# EAGLE board MOD-v2-3 (EAGLE 8.3.1)
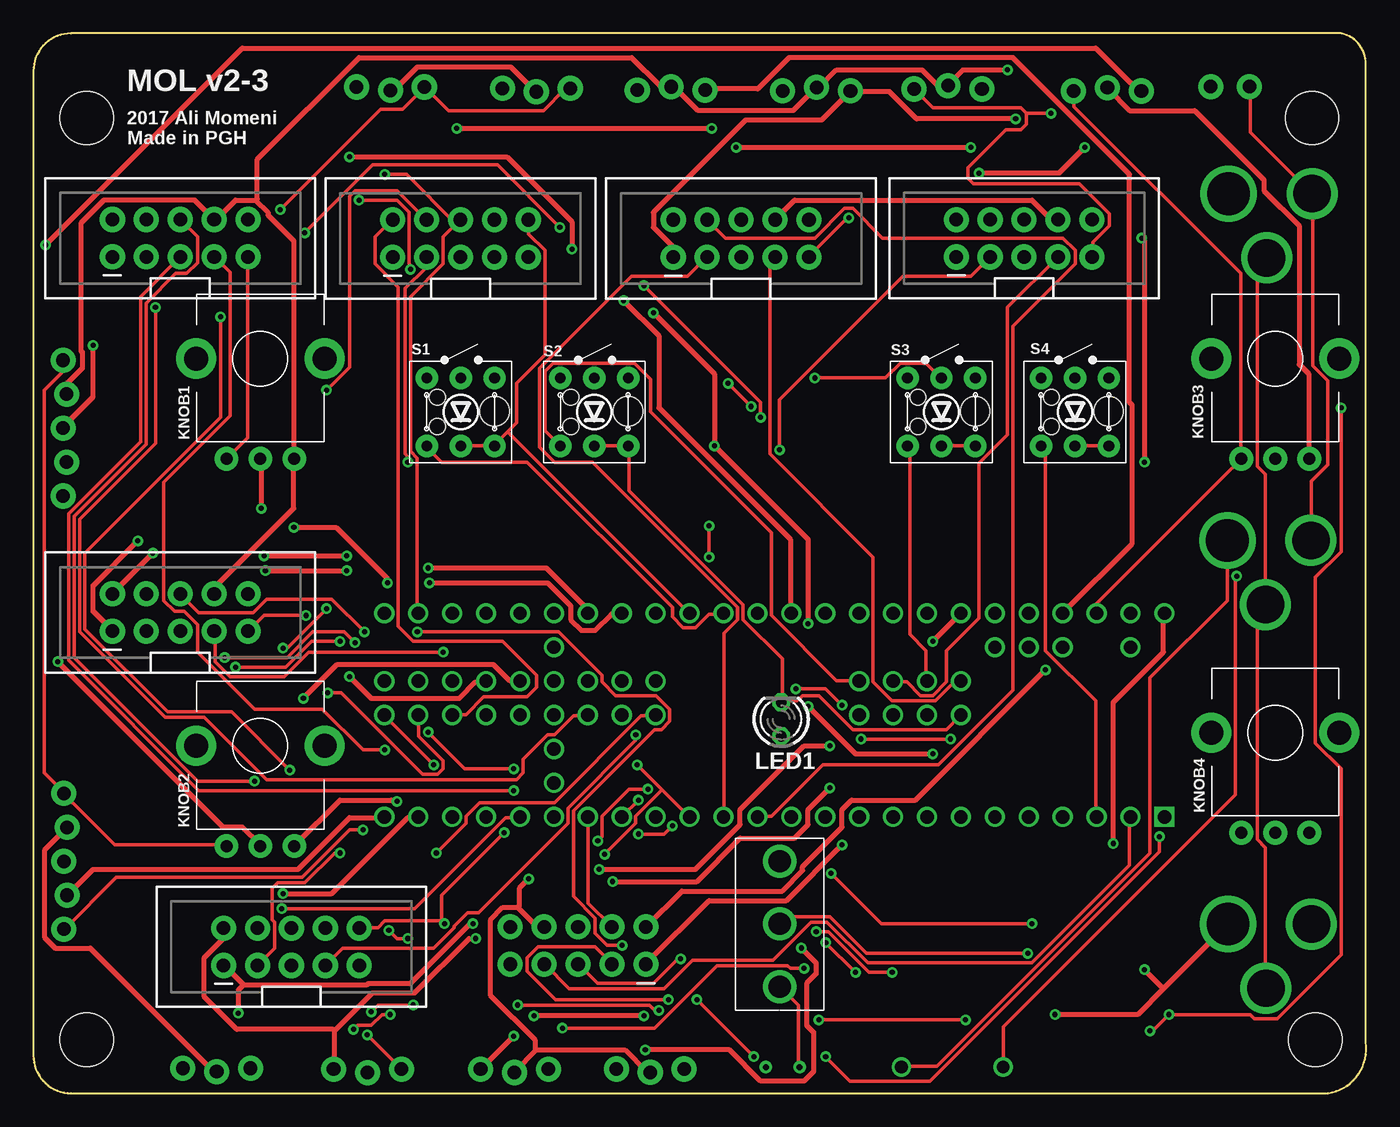
[diagram p0: board, top side]
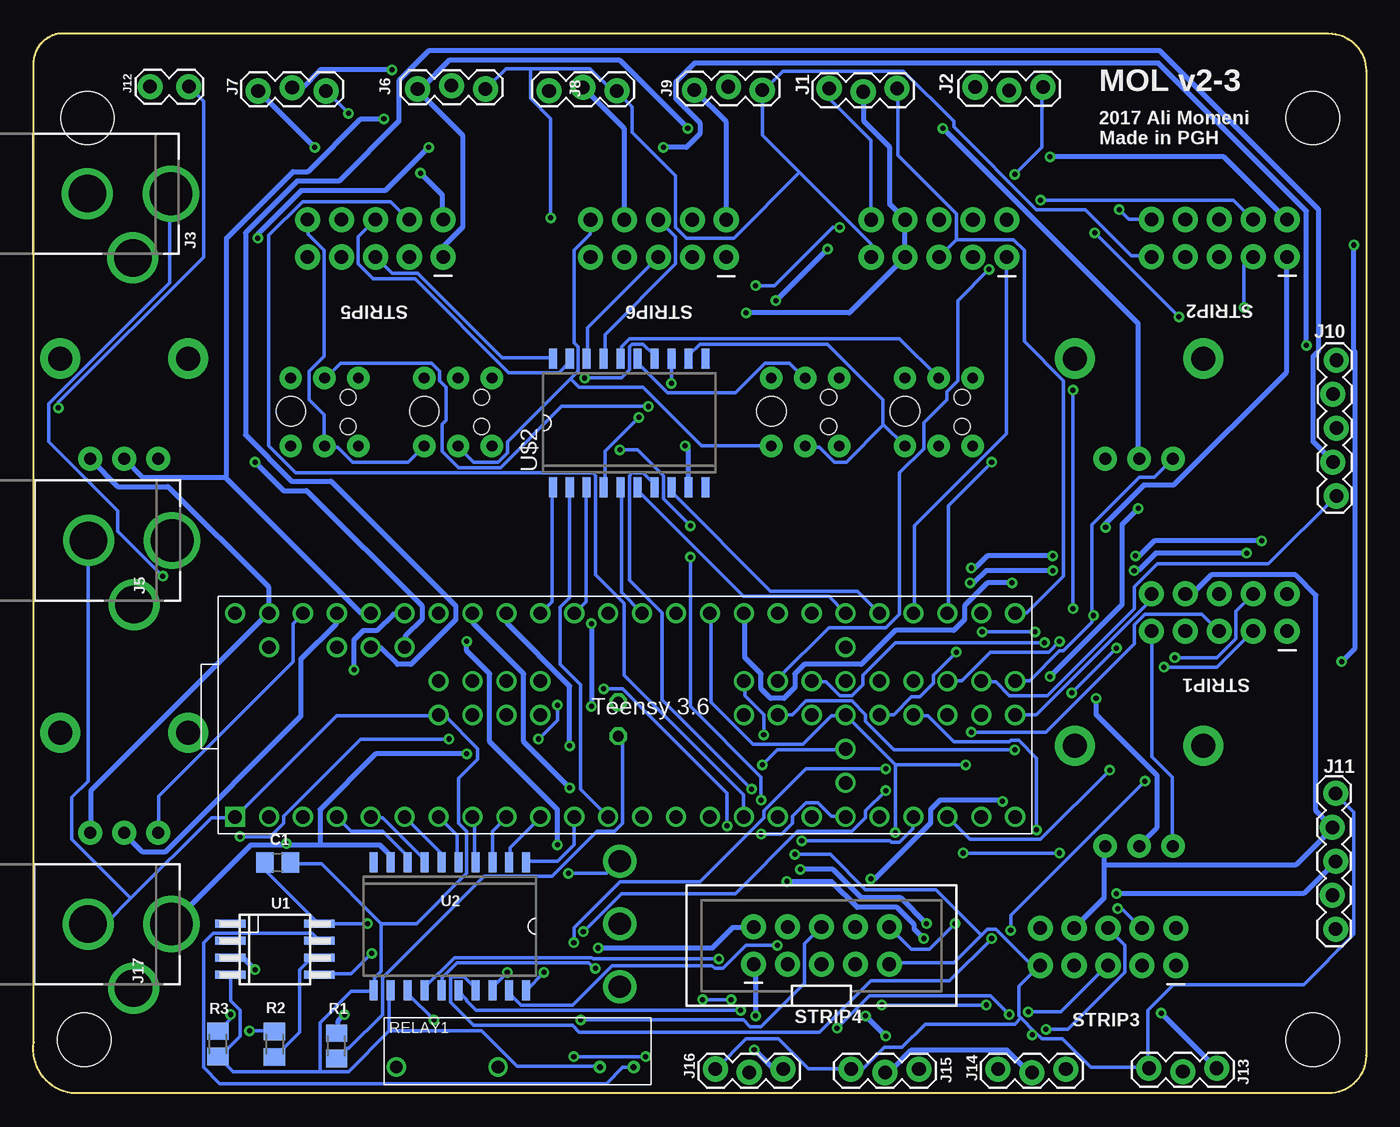
[diagram p1: board, bottom side, seen from below]

Size 99.81 x 79.34 mm. Coordinates in mm from the lower left corner, seen from the top.
Outline: 2.81,79.34 arc90 0,76.53 0,2.81 arc90 2.81,0 96.96,0 arc90 99.77,3.81 99.77,77.26 arc74 97.96,79.34 2.81,79.34
Copper layers (1*16): Top 0.035559375mm / dielectric 1.501140625mm / Bottom 0.035559375mm
Design rules "typical_4pcb *": minimum track width 10mil, minimum drill 15mil, track to track 6mil, track to pad 6mil, pad to pad 6mil, via to via 10mil, smd to smd 6mil, copper to edge 15mil, drill to drill 8mil, minimum pad ring 10mil, minimum via ring 8mil, stop-mask expansion 4mil, vias tented up to drill 0mil, thermal gap 10mil
Net classes: 2 Power: width 0.381 mm, clearance 0.279 mm; 3 Analog Sig: width 0.381 mm, clearance 0.279 mm
Holes 4 mm at 4,73 4,4 96,4 95.75,73

## Footprints (pad centres in the part's own frame; a part is rotated, then mirrored left to right if it is on the bottom)
C0805 = smd 1.3 x 1.5: 1 -0.95,0; 2 0.95,0
1X03_LOCK@1 = drill 1.016 pad 1.88: 1 0,0.127; 2 2.54,-0.127; 3 5.08,0.127
DCJACK_2MM_PTH = drill 2.8: GND 0,7.35; GNDBREAK 4.8,10.75 | drill 3.2: PWR 0,13.6
2X5-SHROUDED_LOCK = drill 1.016 pad 1.88: 1 -1.397,5.08; 2 1.397,5.08; 3 -1.397,2.54; 4 1.397,2.54; 5 -1.397,0; 6 1.397,0; 7 -1.397,-2.54; 8 1.397,-2.54; 9 -1.397,-5.08; 10 1.397,-5.08
1X03_LOCK = drill 1.016 pad 1.88: 1 0,0.127; 2 2.54,-0.127; 3 5.08,0.127
1X05_LOCK = drill 1.016 pad 1.88: 1 0,0.127; 2 2.54,-0.127; 3 5.08,0.127; 4 7.62,-0.127; 5 10.16,0.127
1X02_LOCK = drill 1.016 pad 1.88: 1 -0.178,0; 2 2.718,0
POT_ALPHA_RD901F-40-(L)R1 = drill 0.9 pad 1.778: 1 -2.54,-7.5; 2 0,-7.5; 3 2.54,-7.5 | drill 1.8 pad 3: M1 -4.8,0; M2 4.8,0
LED3MM = drill 0.813 octagon: A -1.27,0; K 1.27,0
M0805 = smd 1.3 x 1.6: 1 -0.95,0; 2 0.95,0
G6DN-1A = drill 0.45: 1 0,0; 2 2.54,0 | drill 0.95: 5 10.16,0; 8 17.78,0
SWITCH_TR2-MOMENTARY-LED = drill 0.8 pad 1.676: 1 2.54,-2.54; 2 2.54,2.54; 3 -2.54,-2.54; 4 -2.54,2.54; A 0,2.54; C 0,-2.54 | hole 2.2: 2.53,0.05 | hole 1.2: -1.76,1.1; -1.76,-1.09
SWITCH_SPDT_500SSP1S2M2QEA = drill 1.65: 1 -4.7,0; 2 0,0; 3 4.7,0
TEENSY3-6_NO-USB-HOST = drill 1: 0 3.81,1.27; 1 6.35,1.27; 2 8.89,1.27; 3 11.43,1.27; 3V3(1) 36.83,1.27; 3V3(2) 46.99,6.35; 3V3(3) 6.35,16.51; 3V3(4) 59.69,11.43; 4 13.97,1.27; 5 16.51,1.27; 6 19.05,1.27; 7 21.59,1.27; 8 24.13,1.27; 9 26.67,1.27; 10 29.21,1.27; 11 31.75,1.27; 12 34.29,1.27; 13 34.29,16.51; 14 31.75,16.51; 15 29.21,16.51; 16 26.67,16.51; 17 24.13,16.51; 18 21.59,16.51; 19 19.05,16.51; 20 16.51,16.51; 21 13.97,16.51; 22 11.43,16.51; 23 8.89,16.51; 24 39.37,1.27; 25 41.91,1.27; 26 44.45,1.27; 27 46.99,1.27; 28 49.53,1.27; 29 52.07,1.27; 30 54.61,1.27; 31 57.15,1.27; 32 59.69,1.27; 33 59.69,16.51; 34 57.15,16.51; 35 54.61,16.51; 36 52.07,16.51; 37 49.53,16.51; 38 46.99,16.51; 39 44.45,16.51; 40 39.37,8.89; 41 41.91,8.89; 42 44.45,8.89; 43 49.53,8.89; 44 52.07,8.89; 45 54.61,8.89; 46 57.15,8.89; 47 57.15,11.43; 48 54.61,11.43; 49 52.07,11.43; 50 49.53,11.43; 51 44.45,11.43; 52 41.91,11.43; 53 39.37,11.43; 54 24.13,11.43; 55 21.59,11.43; 56 19.05,11.43; 57 16.51,11.43; A10 11.43,13.97; A11 13.97,13.97; AGND 3.81,16.51; AREF 8.89,13.97; DAC0 41.91,16.51; DAC1 39.37,16.51; DC 21.59,8.89; DD 24.13,8.89; DE 19.05,8.89; G1 46.99,8.89; G2 36.83,16.51; G3 59.69,8.89; G6 16.51,8.89; P 46.99,11.43; R 46.99,13.97; VBAT 46.99,3.81; VIN 1.27,16.51; VUSB 3.81,13.97 | drill 1 square: G0 1.27,1.27
ATTINY85 = smd 0.6 x 2.286: 1 -1.905,-3.33; 2 -0.635,-3.33; 3 0.635,-3.33; 4 1.905,-3.33; 5 1.905,3.33; 6 0.635,3.33; 7 -0.635,3.33; 8 -1.905,3.33
SOIC20 = smd 0.6 x 1.5: 1 -5.715,-4.8; 2 -4.445,-4.8; 3 -3.175,-4.8; 4 -1.905,-4.8; 5 -0.635,-4.8; 6 0.635,-4.8; 7 1.905,-4.8; 8 3.175,-4.8; 9 4.445,-4.8; 10 5.715,-4.8; 11 5.715,4.8; 12 4.445,4.8; 13 3.175,4.8; 14 1.905,4.8; 15 0.635,4.8; 16 -0.635,4.8; 17 -1.905,4.8; 18 -3.175,4.8; 19 -4.445,4.8; 20 -5.715,4.8

## Placement (x,y rotation side)
C1  10uF  [C0805]  81.51,17.27 0 bottom
J1  SERVO1  [1X03_LOCK@1]  40.21,75.1 0 bottom
J2  SERVO2  [1X03_LOCK@1]  29.28,75.2 0 bottom
J3  TO Pi  [DCJACK_2MM_PTH]  103.11,67.34 270 bottom
J4  ACTUATORS  [2X5-SHROUDED_LOCK]  31.99,63.99 90 top
J5  +5V (Pi)  [DCJACK_2MM_PTH]  103.02,41.38 270 bottom
J6  AN5  [1X03_LOCK]  65.95,75.31 180 bottom
J7  AN6  [1X03_LOCK]  77.89,75.16 180 bottom
J8  AN7  [1X03_LOCK]  56.11,75.17 180 bottom
J9  AN8  [1X03_LOCK]  45.22,75.22 180 bottom
J10  JOY1  [1X05_LOCK]  2.36,54.87 270 bottom
J11  JOY2  [1X05_LOCK]  2.4,22.44 270 bottom
J12  RPi-Shutdown  [1X02_LOCK]  88.35,75.35 180 bottom
J13  AN5  [1X03_LOCK]  16.27,1.75 0 bottom
J14  AN6  [1X03_LOCK]  27.56,1.67 0 bottom
J15  AN7  [1X03_LOCK]  38.57,1.68 0 bottom
J16  AN8  [1X03_LOCK]  48.74,1.69 0 bottom
J17  +5V (Main)  [DCJACK_2MM_PTH]  103.06,12.66 270 bottom
KNOB1  [POT_ALPHA_RD901F-40-(L)R1]  17,55 0 top
KNOB2  [POT_ALPHA_RD901F-40-(L)R1]  17,26 0 top
KNOB3  [POT_ALPHA_RD901F-40-(L)R1]  93,55 0 top
KNOB4  [POT_ALPHA_RD901F-40-(L)R1]  93,27 0 top
LED1  [LED3MM]  56,28 90 top
R1  330  [M0805]  77.1,3.54 270 bottom
R2  2.2K  [M0805]  81.75,3.67 90 bottom
R3  3.3K  [M0805]  85.98,3.69 270 bottom
RELAY1  RELAY-OMRON-G6DN  [G6DN-1A]  54.85,1.96 180 bottom
S1  SW-LEDPTH  [SWITCH_TR2-MOMENTARY-LED]  32,51 0 top
S2  SW-LEDPTH  [SWITCH_TR2-MOMENTARY-LED]  42,51 0 top
S3  SW-LEDPTH  [SWITCH_TR2-MOMENTARY-LED]  68,51 0 top
S4  SW-LEDPTH  [SWITCH_TR2-MOMENTARY-LED]  78,51 0 top
STRIP1  [2X5-SHROUDED_LOCK]  11,35.99 90 top
STRIP2  [2X5-SHROUDED_LOCK]  11,64.01 90 top
STRIP3  [2X5-SHROUDED_LOCK]  19.32,10.96 90 top
STRIP4  [2X5-SHROUDED_LOCK]  40.79,11.05 90 bottom
STRIP5  [2X5-SHROUDED_LOCK]  74.19,64 90 top
STRIP6  [2X5-SHROUDED_LOCK]  53,63.99 90 top
SW2  500SSP1S2M2QEA  [SWITCH_SPDT_500SSP1S2M2QEA]  55.89,12.68 270 top
TEENSY  TEENSY3_6-ALI_NO-USB-HOST  [TEENSY3-6_NO-USB-HOST]  85.97,19.42 0 bottom
U1  ATTINY85  [ATTINY85]  81.71,10.77 270 bottom
U2  A2982  [SOIC20]  68.61,12.5 180 bottom
U$2  A2982  [SOIC20]  55.19,50.18 0 bottom

## Library data of the parts
C1 = resistor
J1 = SparkFun-Connectors; 5V: +5V; GND: GND; SERVO1: SERVO1
J2 = SparkFun-Connectors; 5V: +5V; GND: GND; SERVO2: SERVO_2
J3 J5 J17 = adafruit
J4 STRIP1-STRIP6 = SparkFun-Connectors; PROD_ID: CONN-08671; SF_ID: PRT-08506
J6 = SparkFun-Connectors; AN9: AN9; GND: GND; VCC: VCC
J7 = SparkFun-Connectors; AN10: AN10; GND: GND; VCC: VCC
J8 = SparkFun-Connectors; AN11: AN11; GND: GND; VCC: VCC
J9 = SparkFun-Connectors; AN12: AN12; GND: GND; VCC: VCC
J10 = SparkFun-Connectors; B: B; GND: gnd; H: H; V: V; VCC: vcc
J11 = SparkFun-Connectors; B: B; GND: GND; H: H; V: V; VCC: VCC
J12 = SparkFun-Connectors; GND: GND; SIG: SIG
J13 = SparkFun-Connectors; AN5: AN5; GND: GND; VCC: VCC
J14 = SparkFun-Connectors; AN6: AN6; GND: GND; VCC: VCC
J15 = SparkFun-Connectors; AN7: AN7; GND: GND; VCC: VCC
J16 = SparkFun-Connectors; AN8: AN8; GND: GND; VCC: VCC
KNOB1-KNOB4 RELAY1 S1-S4 TEENSY U2 U$2 = CMU-ArtFab
LED1 = led; GND: -; P: +
R1-R3 = rcl
SW2 = CMU-ArtFab; DIGIKEY: EG5137-ND
U1 = attiny85

## Nets
+3V3: J4.9 J6.1 J7.1 J8.1 J9.1 J10.1 J11.1 J13.1 J14.1 J15.1 J16.1 KNOB1.1 KNOB2.1 KNOB3.1 KNOB4.1 STRIP1.9 STRIP2.9 STRIP3.9 STRIP4.9 STRIP5.9 STRIP6.9 TEENSY.3V3(1) TEENSY.3V3(2) TEENSY.3V3(3) TEENSY.3V3(4)
+5V [Power]: J1.2 J2.2 J4.7 J4.8 J17.PWR R1.1 TEENSY.VIN U1.3 U2.9 U$2.9
+5V-BATTERY: C1.1 SW2.1 U1.8
+5V-BATTERY-PI: J5.PWR RELAY1.5
AGND [Analog Sig]: J6.2 J7.2 J8.2 J9.2 J10.2 J11.2 J13.2 J14.2 J15.2 J16.2 KNOB1.3 KNOB2.3 KNOB3.3 KNOB4.3 STRIP1.8 STRIP2.8 STRIP3.8 STRIP4.8 STRIP5.8 STRIP6.8 TEENSY.AGND
AN1 [Analog Sig]: STRIP1.1 TEENSY.39
AN2 [Analog Sig]: STRIP1.2 TEENSY.DAC0
AN3 [Analog Sig]: STRIP2.1 TEENSY.DAC1
AN4 [Analog Sig]: STRIP2.2 TEENSY.15
AN5 [Analog Sig]: J13.3 STRIP3.1 TEENSY.18
AN6 [Analog Sig]: J14.3 STRIP3.2 TEENSY.19
AN7 [Analog Sig]: J15.3 STRIP4.1 TEENSY.20
AN8 [Analog Sig]: J16.3 STRIP4.2 TEENSY.21
AN9 [Analog Sig]: J6.3 KNOB1.2 STRIP5.1 TEENSY.49
AN10 [Analog Sig]: J7.3 KNOB2.2 STRIP5.2 TEENSY.50
AN11 [Analog Sig]: J8.3 KNOB3.2 STRIP6.1 TEENSY.22
AN12 [Analog Sig]: J9.3 KNOB4.2 STRIP6.2 TEENSY.23
B1: STRIP1.3 TEENSY.48
B2: STRIP1.4 TEENSY.51
B3: STRIP2.3 TEENSY.42
B4: STRIP2.4 TEENSY.52
B5: STRIP3.3 TEENSY.40
B6: STRIP3.4 TEENSY.28
B7: STRIP4.3 TEENSY.27
B8: STRIP4.4 TEENSY.26
B9: STRIP5.3 TEENSY.25
B10: STRIP5.4 TEENSY.24
B11: STRIP6.3 TEENSY.12
B12: STRIP6.4 TEENSY.11
B13: S1.3 TEENSY.13
B14: S2.3 TEENSY.54
B15: S3.3 TEENSY.56
B16: S4.3 TEENSY.1
GND: C1.2 J1.1 J2.1 J3.GND J4.10 J5.GND J12.2 J17.GND LED1.K R3.2 RELAY1.2 S1.1 S1.C S2.1 S2.C S3.1 S3.C S4.1 S4.C STRIP1.10 STRIP2.10 STRIP3.10 STRIP4.10 STRIP5.10 STRIP6.10 SW2.3 TEENSY.G0 TEENSY.G1 TEENSY.G2 TEENSY.G3 TEENSY.G6 U1.4 U2.11 U2.12 U$2.12
GNDBREAK: J3.GNDBREAK J5.GNDBREAK J17.GNDBREAK
JOYB1: J10.5 TEENSY.47
JOYB2: J11.5 TEENSY.44
JOYH1 [Analog Sig]: J10.3 TEENSY.A11
JOYH2 [Analog Sig]: J11.3 TEENSY.31
JOYV1 [Analog Sig]: J10.4 TEENSY.A10
JOYV2 [Analog Sig]: J11.4 TEENSY.32
LED1: STRIP1.7 TEENSY.43
LED2: STRIP2.7 TEENSY.41
LED3: STRIP3.7 TEENSY.53
LED4: STRIP4.7 TEENSY.0
LED5: STRIP5.7 TEENSY.55
LED6: STRIP6.7 TEENSY.57
M_INA: J4.2 TEENSY.45
M_INB: J4.4 TEENSY.46
M_PWMA: J4.1 TEENSY.36
M_PWMB: J4.3 TEENSY.35
N$2: LED1.A R1.2
N$3: SW2.2 U1.5
N$4: RELAY1.1 U1.7
N$5: J12.1 R2.2 R3.1
N$6: J3.PWR RELAY1.8
PI-REST: R2.1 U1.6
PWM1: TEENSY.2 U2.8
PWM2: TEENSY.3 U2.7
PWM3: TEENSY.4 U2.6
PWM4: TEENSY.5 U2.5
PWM5: TEENSY.6 U2.4
PWM6: TEENSY.7 U2.3
PWM7: TEENSY.8 U2.2
PWM8: TEENSY.9 U2.1
PWM9: TEENSY.37 U$2.8
PWM10: TEENSY.29 U$2.7
PWM11: TEENSY.38 U$2.6
PWM12: TEENSY.14 U$2.5
PWM13: TEENSY.30 U$2.4
PWM14: TEENSY.16 U$2.3
PWM15: TEENSY.10 U$2.2
PWM16: TEENSY.17 U$2.1
PWM_1: STRIP1.5 U2.20
PWM_2: STRIP1.6 U2.19
PWM_3: STRIP2.5 U2.18
PWM_4: STRIP2.6 U2.17
PWM_5: STRIP3.5 U2.16
PWM_6: STRIP3.6 U2.15
PWM_7: STRIP4.5 U2.14
PWM_8: STRIP4.6 U2.13
PWM_9: STRIP5.5 U$2.20
PWM_10: STRIP5.6 U$2.19
PWM_11: STRIP6.5 U$2.18
PWM_12: STRIP6.6 U$2.17
PWM_13: S1.A U$2.16
PWM_14: S2.A U$2.15
PWM_15: S3.A U$2.14
PWM_16: S4.A U$2.13
S1: J1.3 J4.5 TEENSY.33
S2: J2.3 J4.6 TEENSY.34

## Tracks (layer width: path | path; a pad name or v marks a point on that pad's centre or on a via)
+3V3  (via drill 0.38)
  Top 0.254: 47.09,22.71 49.07,20.73 TEENSY.3V3(1) | 47.09,22.71 v45.21,24.59 | v24.99,4.37 27.53,1.83 J14.1 | 47.09,22.71 45.11,20.73 45.11,20.22 v42.77,17.88 | STRIP2.9 16.05,62.59 16.05,49.07 14.53,47.55 KNOB1.1 | KNOB2.1 14.43,18.59 6.1,18.59 2.34,22.35 J11.1 2.23,22.55 0.81,23.98 0.81,52.63 2.13,53.95 2.13,54.86 J10.1 | v20.42,35.76 17.27,35.76 16.15,34.65 STRIP1.9 | TEENSY.3V3(3) 79.65,35.97 79.65,36.68 90.42,47.45 KNOB3.1 90.42,47.55 90.42,61.37 77.93,73.86 77.93,74.98 J7.1 | v61.06,65.53 60.96,65.53 58.12,62.69 STRIP6.9 | 74.37,73.36 74.37,72.54 73.97,72.14 72.85,72.14 70,69.29 70,68.48 70.41,68.07 78.33,68.07 80.57,65.84 80.57,64.92 79.35,63.7 79.35,62.69 STRIP5.9 | 74.37,73.36 73.97,73.76 67.36,73.76 66.04,75.08 J6.1 | 74.37,73.36 v76.2,73.36
  Bottom 0.254: v45.21,24.59 44.09,25.7 39.01,25.7 TEENSY.3V3(2) | J16.1 48.67,1.83 46.43,4.06 43.99,4.06 41.76,1.83 38.61,1.83 J15.1 38.51,1.83 37.69,1.83 36.07,3.45 34.75,3.45 33.02,5.18 26.31,5.18 25.86,5.64 | 25.86,5.64 26.01,5.79 26.01,8.03 24.49,9.55 STRIP3.9 24.79,9.35 27.74,12.29 28.35,12.29 28.8,11.84 | 25.86,5.64 24.79,4.57 | 24.79,4.57 24.28,4.06 22.76,4.06 20.62,1.93 16.36,1.93 J13.1 16.36,2.03 16.36,6.2 14.43,8.13 4.67,8.13 0.91,11.89 0.91,21.03 2.23,22.35 J11.1 | 24.79,4.57 v24.99,4.37 | 28.8,11.84 30.89,9.75 35.66,9.75 STRIP4.9 | v42.77,17.88 40.13,17.88 37.49,15.24 32.21,15.24 28.8,11.84 | 20.52,35.76 20.52,42.57 16.97,46.13 15.85,46.13 14.53,47.45 KNOB1.1 | 20.52,35.76 20.52,35.26 22.66,33.12 22.96,33.12 25.2,30.89 26.21,30.89 TEENSY.3V3(4) | STRIP1.9 16.05,34.54 16.05,25.2 14.53,23.67 14.53,18.59 KNOB2.1 | v20.42,35.76 20.52,35.76 | KNOB4.1 90.42,19.51 90.42,22.25 80.37,32.31 80.37,35.15 79.65,35.87 TEENSY.3V3(3) | 42.42,68.94 45.21,71.73 J9.1 45.11,75.08 43.69,76.5 34.65,76.5 30.89,72.75 30.89,72.34 24.69,66.14 21.03,66.14 17.58,62.69 16.15,62.69 STRIP2.9 | 42.42,68.94 37.08,63.6 37.08,62.69 J4.9 | 62.59,76.71 64.41,76.71 65.94,75.18 J6.1 | 62.59,76.71 58.12,76.71 56.49,75.08 56.19,75.08 J8.1 56.08,74.98 54.97,73.86 54.97,71.93 51.71,68.68 51.71,64.82 50.9,64.01 47.35,64.01 42.42,68.94 | v61.06,65.53 61.06,72.95 62.59,74.47 62.59,76.71 | v76.2,73.36 77.83,74.98 J7.1
+5V  (via drill 0.38)
  Top 0.381: v76.5,5.89 82.7,5.89 84.63,7.82 | 84.63,7.82 89.41,12.6 J17.PWR | 84.63,7.82 v83.21,9.25 | v80.87,18.69 80.87,29.26 84.63,33.02 84.63,35.87 TEENSY.VIN | v46.43,58.42 51,53.85 v51,48.46 58.01,41.45 v58.01,35.15 | J2.2 26.82,75.08 27.03,75.08 28.75,76.81 35.76,76.81 37.59,74.98 J1.2 | v67.36,25.4 61.57,25.4 v58.01,28.96
  Bottom 0.381: 80.87,18.59 83.52,18.59 89.41,12.7 J17.PWR | 80.87,18.59 78.33,18.59 | 78.33,18.59 73.86,18.59 73.15,17.88 73.15,17.37 U2.9 | v76.5,5.89 77.01,5.38 77.01,4.57 R1.1 | v83.21,9.25 84.02,10.06 85.04,10.06 U1.3 | v80.87,18.69 80.87,18.59 | v51,48.46 50.8,48.26 50.8,45.41 U$2.9 | v46.43,58.42 38.71,58.42 34.54,62.59 J4.7 34.54,62.79 34.54,65.33 J4.8 34.65,65.53 35.66,66.55 35.66,70.81 37.59,72.75 37.59,74.88 J1.2 | 78.33,18.59 78.33,21.23 74.17,25.4 v67.36,25.4 | v58.01,35.15 v58.01,28.96
+5V-BATTERY  (via drill 0.38)
  Top 0.254: v74.78,12.7 63.5,12.7 v59.74,16.46
  Bottom 0.254: C1.1 82.4,17.17 82.4,16.66 78.44,12.7 U1.8 78.33,12.7 v74.78,12.7 | v59.74,16.46 56.9,16.46 55.98,17.37 SW2.1
+5V-BATTERY-PI
  Top 0.254: RELAY1.5 65.02,2.03 67.67,2.03 83.62,17.98 83.62,31.09 89.41,36.88 89.41,41.35 J5.PWR
AGND  (via drill 0.38)
  Top 0.381: STRIP5.8 76.71,65.43 76.2,65.43 74.78,66.85 57,66.85 55.58,65.43 STRIP6.8 | v72.95,76.61 69.6,76.61 68.58,75.59 J6.2 68.48,75.49 67.67,75.49 66.55,76.61 60.15,76.61 58.83,75.29 J8.2 58.62,75.29 56.9,73.56 49.78,73.56 48.06,75.29 47.85,75.29 J9.2 47.65,75.49 46.84,75.49 44.81,77.52 24.38,77.52 16.76,69.9 16.76,66.95 16.66,66.85 | KNOB3.3 95.5,47.55 95.5,53.85 94.79,54.56 94.79,64.92 92.15,67.56 92.15,68.38 86.97,73.56 82.09,73.56 80.47,75.18 J7.2 | STRIP1.8 13.61,37.39 13.61,37.9 19.51,43.79 19.51,47.45 KNOB1.3 19.51,47.65 19.51,63.8 17.58,65.73 17.58,65.94 16.66,66.85 | J10.2 2.54,52.43 2.54,53.14 3.66,54.25 3.66,55.47 3.56,55.58 3.56,65.13 5.28,66.85 12.09,66.85 13.51,65.43 STRIP2.8 13.72,65.43 15.14,66.85 16.66,66.85 | 37.69,3.25 44.3,3.25 45.92,1.63 46.13,1.63 J16.2 | 37.69,3.25 36.07,1.63 J15.2 | 36.27,13.92 37.69,12.5 38.2,12.5 STRIP4.8 | 36.27,13.92 35.15,13.92 34.24,13.01 34.24,7.32 37.59,3.96 37.59,3.35 37.69,3.25 | J13.2 13.72,1.63 13.51,1.63 4.27,10.87 1.63,10.87 0.81,11.68 0.81,18.19 2.44,19.81 J11.2 | v37.08,16.05 36.37,15.34 36.37,14.02 36.27,13.92 | v27.23,21.84 26.92,21.84 26.82,21.95 22.96,21.95 19.61,18.59 KNOB2.3
  Bottom 0.381: KNOB3.3 95.5,47.45 93.47,45.41 89.71,45.41 82.19,37.9 82.19,35.97 TEENSY.AGND 82.3,35.87 95.5,22.66 95.5,19.51 KNOB4.3 | STRIP6.8 55.58,65.43 55.58,72.24 58.62,75.29 J8.2 | v72.95,76.61 78.33,76.61 79.65,75.29 80.37,75.29 J7.2 | J14.2 25.09,1.63 25.3,1.63 26.92,3.25 34.04,3.25 35.66,1.63 35.97,1.63 J15.2 | 19.61,17.07 19.61,14.63 21.84,12.39 STRIP3.8 | 19.61,17.07 19.61,18.49 KNOB2.3 | 19.61,17.07 5.28,17.07 2.54,19.81 J11.2 2.64,20.02 3.76,21.13 3.76,37.29 5.28,38.81 11.58,38.81 13.01,37.39 13.51,37.39 STRIP1.8 | v37.08,16.05 36.78,16.05 32.61,20.22 32.61,21.23 31.9,21.95 27.33,21.95 v27.23,21.84
AN1  (via drill 0.38)
  Top 0.381: v29.57,39.32 38.41,39.32 41.45,36.27 41.45,35.97 TEENSY.39 | v17.27,40.23 v23.47,40.23 | v7.82,41.35 4.47,38 4.47,36.07 5.89,34.65 STRIP1.1
  Bottom 0.381: v29.57,39.32 29.26,39.32 28.35,40.23 v23.47,40.23 | v17.27,40.23 16.97,40.23 15.85,41.35 v7.82,41.35
AN2  (via drill 0.38)
  Top 0.381: v29.67,38.2 38.51,38.2 40.23,36.47 40.23,35.46 41.05,34.65 42.06,34.65 43.28,35.87 43.99,35.87 TEENSY.DAC0 | v17.37,39.12 v23.47,39.12 | v8.94,40.44 5.89,37.39 STRIP1.2
  Bottom 0.381: v29.67,38.2 29.36,38.2 28.45,39.12 v23.47,39.12 | v17.37,39.12 17.07,39.12 15.75,40.44 v8.94,40.44
AN3  (via drill 0.38)
  Top 0.381: v26.52,38.2 26.52,38.51 22.66,42.37 v19.51,42.37
  Bottom 0.381: v26.52,38.2 28.35,38.2 30.07,36.47 30.07,35.46 30.89,34.65 35.26,34.65 37.8,32.11 42.06,32.11 42.77,31.39 42.77,30.38 43.59,29.57 44.6,29.57 45.31,30.28 45.31,31.39 46.53,32.61 46.53,35.87 TEENSY.DAC1 | v19.51,42.37 19.51,42.67 16.66,45.52 14.43,45.52 5.99,53.95 5.99,62.59 STRIP2.1
AN4  (via drill 0.38)
  Top 0.381: v44.2,59.33 46.84,56.69 46.84,51.31 56.69,41.45 56.69,35.97 TEENSY.15 | v40.34,63.2 40.34,65.23 35.46,70.1 v23.67,70.1
  Bottom 0.381: v40.34,63.2 v44.2,59.33 | v23.67,70.1 10.67,70.1 5.99,65.43 STRIP2.2
AN5  (via drill 0.38)
  Top 0.381: v59.64,26.01 57.71,26.01 52.93,21.23 52.93,20.12 49.58,16.76 v42.37,16.76 | v32.92,12.7 32.72,12.7 28.25,8.23 25.09,8.23 24.99,8.13 15.75,8.13 | 15.75,8.13 14.33,9.55 STRIP3.1 | v15.34,5.99 15.34,7.72 15.75,8.13
  Bottom 0.381: v59.64,26.01 59.64,30.48 64.31,35.15 64.31,35.87 TEENSY.18 | v42.37,16.76 39.93,16.76 37.8,14.63 34.85,14.63 v32.92,12.7 | v15.34,5.99 11.28,1.93 J13.3
AN6  (via drill 0.38)
  Top 0.381: v59.64,22.86 58.01,21.23 58.01,20.12 57,19.1 52.93,19.1 49.68,15.85 v43.38,15.85 | v33.12,11.58 32.61,11.58 28.55,7.52 25.4,7.52 22.55,4.67 | 22.55,4.67 22.55,1.83 J14.3 | STRIP3.2 14.22,12.29 14.22,11.58 12.8,10.16 12.8,7.21 15.24,4.78 22.45,4.78 22.55,4.67
  Bottom 0.381: v59.64,22.86 63.09,26.31 63.09,31.39 66.85,35.15 66.85,35.87 TEENSY.19 | v43.38,15.85 40.03,15.85 38.1,13.92 35.15,13.92 33.83,12.6 33.83,12.29 v33.12,11.58
AN7  (via drill 0.38)
  Top 0.381: v67.36,33.83 69.39,35.87 TEENSY.20 | v60.55,18.59 56.39,14.43 50.6,14.43 45.92,9.75 STRIP4.1 | v35.97,4.27 33.53,1.83 J15.3 | v45.72,5.79 v37.49,5.79
  Bottom 0.381: v67.36,33.83 67.36,33.12 65.63,31.39 65.63,26.31 60.55,21.23 v60.55,18.59 | v37.49,5.79 v35.97,4.27 | v45.72,5.79 45.72,9.55 45.82,9.65 STRIP4.1
AN8  (via drill 0.38)
  Top 0.381: v75.79,31.7 66.04,21.95 61.27,21.95 60.55,21.23 60.55,19.91 57.61,16.97 57.61,16.66 56.08,15.14 48.56,15.14 45.92,12.5 STRIP4.2 | v45.82,3.25 52.12,3.25 54.46,0.91 57.71,0.91 58.42,1.63 58.42,4.57 57.91,5.08 57.91,8.23 58.62,8.94 58.62,9.75 v57.51,10.87
  Bottom 0.381: v75.79,31.7 75.79,33.93 75.08,34.65 74.07,34.65 72.85,35.87 72.03,35.87 TEENSY.21 | v45.82,3.25 44.4,1.83 43.69,1.83 J16.3 | v57.51,10.87 48.97,10.87 47.45,12.39 45.92,12.39 STRIP4.2
AN9  (via drill 0.38)
  Top 0.381: v23.67,31.19 25.3,29.57 31.9,29.57 33.12,30.79 33.83,30.79 TEENSY.49 | v17.07,43.79 17.07,47.45 KNOB1.2 | v31.7,72.24 v50.8,72.24
  Bottom 0.381: STRIP5.1 69.09,62.69 69.09,63.4 67.67,64.82 67.67,71.73 71.02,75.08 J6.3 70.92,75.29 70.71,75.29 68.68,77.32 55.88,77.32 v50.8,72.24 | v23.67,31.19 18.29,36.58 18.29,42.57 v17.07,43.79 | v31.7,72.24 17.07,57.61 17.07,47.55 KNOB1.2
AN10  (via drill 0.38)
  Top 0.381: v70.81,68.89 76.81,68.89 v78.74,70.81 | v20.22,29.57 22.76,32.11 34.44,32.11 35.66,30.89 36.37,30.89 TEENSY.50 | v0.91,63.5 15.65,78.23 79.55,78.23 82.7,75.08 82.91,75.08 J7.3 | v1.83,32.31 14.22,19.91 15.65,19.91 16.97,18.59 KNOB2.2
  Bottom 0.381: v70.81,68.89 69.19,67.26 69.19,65.43 STRIP5.2 | v78.74,70.81 82.91,74.98 J7.3 | v20.22,29.57 20.22,28.35 15.65,23.77 15.65,19.91 16.97,18.59 KNOB2.2 | v0.91,63.5 0.91,55.58 0.81,55.47 0.81,33.33 v1.83,32.31
AN11  (via drill 0.38)
  Top 0.381: STRIP6.1 47.85,62.69 47.85,63.4 46.43,64.82 46.43,65.94 53.34,72.85 59.03,72.85 61.16,74.98 J8.3 61.37,74.98 64.11,74.98 66.14,72.95 v73.56,72.95
  Bottom 0.381: 85.45,46.13 75.29,35.97 74.57,35.97 TEENSY.22 | 85.45,46.13 91.64,46.13 92.96,47.45 KNOB3.2 | v73.56,72.95 75.29,72.95 79.25,68.99 80.37,68.99 85.34,64.01 85.34,46.23 85.45,46.13
AN12
  Top 0.381: J9.3 50.39,75.18 54.25,75.18 56.59,77.52 73.36,77.52 82.09,68.78 82.09,51.71 82.3,51.51 82.3,41.15 77.11,35.97 TEENSY.23
  Bottom 0.381: STRIP6.2 47.95,65.43 47.95,72.75 J9.3 | TEENSY.23 77.11,35.87 77.11,35.15 79.76,32.51 79.76,28.25 89.92,18.09 91.64,18.09 92.96,19.41 KNOB4.2
B1  (via drill 0.38)
  Top 0.254: v22.96,33.83 20.83,33.83 18.9,31.9 v15.14,31.9
  Bottom 0.254: v22.96,33.83 23.77,33.02 28.14,33.02 30.28,30.89 31.29,30.89 TEENSY.48 | v15.14,31.9 11.18,31.9 8.53,34.54 STRIP1.3
B2  (via drill 0.38)
  Top 0.254: v24.08,33.73 23.27,34.54 20.93,34.54 19,32.61 v14.33,32.61
  Bottom 0.254: v24.08,33.73 35.26,33.73 37.69,31.29 37.69,30.58 38.51,29.77 39.42,29.77 40.44,30.79 41.45,30.79 TEENSY.51 | v14.33,32.61 11.18,32.61 9.75,34.04 9.75,36.07 8.53,37.29 STRIP1.4
B3  (via drill 0.38)
  Top 0.254: v9.14,58.83 9.14,48.67 3.45,42.98 3.45,34.54 9.86,28.14 12.8,28.14 17.48,23.47 36.17,23.47 36.68,23.98 36.68,24.99 38.51,26.82 39.01,26.82 40.44,28.25 41.45,28.25 TEENSY.42
  Bottom 0.254: v9.14,58.83 9.14,61.98 8.53,62.59 STRIP2.3
B4  (via drill 0.38)
  Top 0.254: v28.25,61.67 28.25,61.98 28.14,62.08 28.14,65.94 27.23,66.85 v24.38,66.85
  Bottom 0.254: v28.25,61.67 30.58,59.33 30.58,53.34 31.39,52.53 31.39,51.92 33.12,50.19 33.12,48.26 34.95,46.43 34.95,35.87 35.97,34.85 40.23,34.85 43.99,31.09 43.99,30.89 TEENSY.52 | v24.38,66.85 9.96,66.85 8.53,65.43 STRIP2.4
B5  (via drill 0.38)
  Top 0.254: v30.18,17.98 32.41,20.22 32.41,20.73 33.43,21.74 39.01,21.74 45.52,28.25 46.53,28.25 TEENSY.40 | v22.96,17.98 22.55,17.98 20.32,15.75 18.29,15.75 17.88,15.34 17.88,13.01 18.09,12.8 18.09,10.87 16.87,9.65 STRIP3.3
  Bottom 0.254: v22.96,17.98 v30.18,17.98
B6  (via drill 0.38)
  Top 0.254: v18.59,13.82 28.55,13.82 35.36,20.62 36.37,20.62 TEENSY.28
  Bottom 0.254: v18.59,13.82 18.29,13.82 16.87,12.39 STRIP3.4
B7  (via drill 0.38)
  Top 0.254: v45.31,19.41 47.24,19.41 v47.85,20.02 | v57.1,30.28 59.33,30.28 v60.55,29.06 | v68.68,26.52 v61.98,26.52 | v84.33,19.2 84.33,18.09 67.16,0.91 61.16,0.91 v59.33,2.74 | v49.68,7.01 v53.95,2.74 | v47.55,7.01 39.12,7.01 36.98,9.14 36.98,10.16 37.8,10.97 42.06,10.97 43.28,9.75 STRIP4.3
  Bottom 0.254: v45.31,19.41 43.79,19.41 42.98,20.22 42.98,20.73 41.96,21.74 41.05,21.74 40.03,20.73 39.01,20.73 TEENSY.27 | v47.85,20.02 47.85,22.45 55.68,30.28 v57.1,30.28 | v60.55,29.06 60.55,27.94 v61.98,26.52 | v68.68,26.52 75.29,26.52 81.08,20.73 81.08,20.22 82.09,19.2 v84.33,19.2 | v53.95,2.74 v59.33,2.74 | v47.55,7.01 v49.68,7.01
B8
  Top 0.254: TEENSY.26 41.55,20.62 41.55,14.22 43.28,12.5 STRIP4.4
B9  (via drill 0.38)
  Top 0.254: v45.31,21.95 44.09,20.73 TEENSY.25 | v50.6,42.47 v50.6,40.13 | v55.88,48.16 55.88,51.92 65.13,61.16 70.21,61.16 71.63,62.59 STRIP5.3
  Bottom 0.254: v45.31,21.95 45.31,23.67 50.6,28.96 v50.6,40.13 | v50.6,42.47 52.63,44.5 52.63,46.23 54.56,48.16 v55.88,48.16
B10
  Bottom 0.254: TEENSY.24 46.63,20.73 46.63,22.35 55.58,31.29 55.58,36.68 57.71,38.81 57.71,46.23 57.91,46.43 80.16,46.43 82.19,48.46 82.19,64.21 79.65,66.75 73.05,66.75 71.73,65.43 STRIP5.4
B11
  Top 0.254: TEENSY.12 51.71,20.73 51.71,34.44 52.73,35.46 52.73,36.37 41.86,47.24 39.01,47.24 37.9,48.36 37.9,54.25 44.81,61.16 48.97,61.16 50.39,62.59 STRIP6.3
B12
  Top 0.254: TEENSY.11 54.25,20.73 55.27,20.73 59.13,24.59 67.77,24.59 73.36,30.18 73.36,57.4 78.03,62.08 78.03,63.09 77.11,64.01 63.6,64.01 61.37,66.24 60.76,66.24 58.52,64.01 51.82,64.01 50.49,65.33 STRIP6.4
B13
  Top 0.254: TEENSY.13 51.61,35.87 50.6,35.87 49.58,34.85 48.67,34.85 47.85,35.66 47.85,36.37 36.98,47.24 30.58,47.24 29.46,48.36 S1.3
B14
  Top 0.254: TEENSY.54 61.77,30.89 60.15,30.89 55.27,35.76 55.27,41.96 46.23,51 46.23,53.44 45.01,54.66 38.91,54.66 38.3,54.05 38.3,49.58 39.42,48.46 S2.3
B15
  Top 0.254: TEENSY.56 66.85,30.89 66.85,33.12 65.63,34.34 65.63,48.26 65.53,48.36 S3.3
B16
  Top 0.254: TEENSY.1 79.55,20.73 79.55,29.36 75.79,33.12 75.79,48.06 75.49,48.36 S4.3
GND  (via drill 0.38)
  Top 0.254: J12.2 91.14,75.29 91.14,71.93 95.71,67.36 J3.GND 95.81,67.26 95.81,54.46 96.93,53.34 96.93,47.04 95.71,45.82 95.71,41.45 J5.GND | RELAY1.2 57.3,2.03 57.3,6.6 55.98,7.92 SW2.3 | TEENSY.G6 69.39,28.25 68.38,27.23 61.37,27.23 58.83,29.77 57.61,29.77 57.2,29.36 56.08,29.36 LED1.K 56.08,29.46 56.08,32.51 53.14,35.46 53.14,36.58 44.6,45.11 44.6,48.36 S2.1 44.5,48.46 42.06,48.46 S2.C | STRIP3.10 24.49,12.39 25.81,12.39 26.31,12.9 30.58,12.9 v30.79,12.7 30.58,13.01 30.58,14.83 v35.26,19.51 | v29.97,24.59 26.31,28.25 TEENSY.G3 | v18.49,66.14 26.01,73.66 27.64,73.66 29.26,75.29 J2.1 29.36,75.29 31.09,73.56 38.2,73.56 39.83,75.18 40.13,75.18 J1.1 | S1.C 34.44,48.46 S1.1 34.54,48.56 35.51,49.53 | S4.C 78.03,48.46 80.47,48.46 S4.1 | S3.C 68.07,48.46 70.51,48.46 S3.1 | 35.51,49.53 36.17,50.19 36.17,53.14 38.3,55.27 38.3,63.09 37.08,64.31 37.08,65.33 J4.10 | 35.51,49.53 49.07,35.97 TEENSY.G2
  Bottom 0.254: 73.15,4.67 73.15,7.62 U2.12 | 73.15,4.67 76.2,1.63 78.33,1.63 | 78.33,1.63 84.84,1.63 85.95,2.74 R3.2 85.85,2.74 84.33,4.27 84.33,6.2 85.04,6.91 85.04,8.84 U1.4 | 78.33,1.63 78.33,5.28 76,7.62 74.37,7.62 U2.11 74.27,7.72 74.27,8.64 73.76,9.14 73.76,12.7 | 73.76,12.7 78.23,17.17 80.47,17.17 C1.2 | 73.15,4.67 66.24,4.67 63.6,2.03 57.4,2.03 RELAY1.2 | 92.51,14.58 94.39,12.7 95.71,12.7 J17.GND | 92.51,14.58 86.46,20.62 84.73,20.62 TEENSY.G0 84.63,20.73 77.11,28.25 69.49,28.25 TEENSY.G6 69.39,28.25 68.99,28.25 66.55,25.81 66.55,24.99 67.97,23.57 67.97,20.22 67.36,19.61 67.36,16.46 71.12,12.7 73.76,12.7 | 92.51,14.58 96.93,19 96.93,22.15 95.71,23.37 95.71,41.35 J5.GND | TEENSY.G3 26.21,28.35 24.69,28.35 16.15,36.88 16.15,37.29 STRIP1.10 | v30.79,12.7 32.72,10.77 34.04,10.77 35.66,12.39 STRIP4.10 | TEENSY.G2 49.07,35.87 49.07,29.26 45.92,26.11 42.16,26.11 40.03,28.25 39.01,28.25 TEENSY.G1 38.91,28.25 35.26,24.59 | 35.26,24.59 v35.26,19.51 | 35.26,24.59 v29.97,24.59 | J4.10 37.08,65.43 37.08,71.32 40.13,74.37 40.13,75.18 J1.1 | v18.49,66.14 17.78,65.43 16.15,65.43 STRIP2.10 | 36.17,50.09 36.17,51.92 40.34,56.08 49.89,56.08 50.7,55.27 50.7,55.07 U$2.12 | 36.17,50.09 S1.1 | S2.C 41.96,48.36 40.95,48.36 39.83,47.24 38.91,47.24 36.17,49.99 36.17,50.09 | STRIP5.10 79.25,65.33 79.25,64.31 78.03,63.09 78.03,55.17 79.15,54.05 79.15,51.92 78.03,50.8 78.03,48.46 S4.C 77.93,48.36 77.01,48.36 75.89,47.24 71.73,47.24 70.61,48.36 S3.1 | 59.59,53.49 64.31,48.77 64.31,47.95 65.02,47.24 66.85,47.24 67.97,48.36 S3.C | 59.59,53.49 59.03,54.05 59.03,55.88 59.33,56.19 59.33,63.09 58.12,64.31 58.12,65.33 STRIP6.10
  Bottom 0.254: 59.59,53.49 58.93,52.83 54.15,52.83 49.78,48.46 44.6,48.46 S2.1
GNDBREAK
  Top 0.254: J3.GNDBREAK 92.35,62.48 91.64,61.77 91.64,46.94 92.25,46.33 92.25,36.68 J5.GNDBREAK 92.25,36.47 91.64,35.87 91.64,19 92.25,18.39 92.25,7.92 J17.GNDBREAK
JOYB1
  Bottom 0.254: TEENSY.47 28.75,30.79 27.74,30.79 26.72,29.77 23.88,29.77 17.37,36.27 17.37,37.9 15.65,39.62 7.32,39.62 J10.5
JOYB2  (via drill 0.38)
  Top 0.254: v24.69,19.71 23.67,19.71 20.12,16.15 6.2,16.15 2.34,12.29 J11.5
  Bottom 0.254: v24.69,19.71 24.69,25.09 26.01,26.42 26.62,26.42 26.72,26.31 30.89,26.31 32.82,28.25 33.83,28.25 TEENSY.44
JOYH1  (via drill 0.38)
  Top 0.381: v83.21,47.24 83.21,63.8 v83.01,64.01 | v52.63,70.81 v70.21,70.81 | v4.47,55.98 4.47,52.12 2.23,49.89 J10.3
  Bottom 0.381: v83.21,47.24 81.08,45.11 79.35,45.11 70.71,36.47 70.71,35.46 71.93,34.24 71.93,33.43 TEENSY.A11 | v83.01,64.01 83.01,64.31 79.76,67.56 73.46,67.56 v70.21,70.81 | v52.63,70.81 50.9,70.81 49.89,71.83 49.89,72.64 51.71,74.47 51.71,75.69 50.29,77.11 15.54,77.11 4.47,66.04 v4.47,55.98
JOYH2  (via drill 0.38)
  Top 0.381: v18.69,14.94 22.35,14.94 28.04,20.62 28.75,20.62 TEENSY.31
  Bottom 0.381: v18.69,14.94 4.67,14.94 2.34,17.27 J11.3
JOYV1
  Bottom 0.381: TEENSY.A10 74.47,33.33 73.76,33.33 72.54,32.11 71.53,32.11 68.17,35.46 68.17,36.47 77.52,45.82 80.47,45.82 83.92,49.28 83.92,64.41 80.06,68.28 76.91,68.28 72.44,72.75 72.44,75.79 70.21,78.03 15.44,78.03 3.56,66.14 3.56,55.58 3.96,55.17 3.96,48.77 2.54,47.35 J10.4
JOYV2
  Top 0.381: TEENSY.32 26.21,20.62 23.67,20.62 19.81,16.76 4.47,16.76 2.54,14.83 J11.4
LED1  (via drill 0.38)
  Top 0.254: v30.68,33.02 20.62,33.02 18.8,31.19 14.73,31.19 13.61,32.31 13.61,34.54 STRIP1.7
  Bottom 0.254: v30.68,33.02 32.41,31.29 32.41,30.68 33.43,29.67 34.04,29.67 35.36,28.35 36.37,28.35 TEENSY.43
LED2  (via drill 0.38)
  Top 0.254: v26.31,25.7 24.69,25.7 21.64,28.75 16.56,28.75 12.29,33.02 12.29,35.05 11.28,36.07 10.57,36.07 9.75,36.88 9.75,45.72 14.73,50.7 14.73,61.47 13.61,62.59 STRIP2.7
  Bottom 0.254: v26.31,25.7 35.36,25.7 37.49,27.84 37.49,28.35 38.51,29.36 41.96,29.36 42.98,28.35 43.99,28.35 TEENSY.41
LED3  (via drill 0.38)
  Top 0.254: v45.11,26.82 45.11,26.42 40.03,21.34 40.03,20.22 33.33,13.51 32.51,13.51 31.5,12.5 31.5,12.39 29.97,10.87 23.16,10.87 21.95,9.65 STRIP3.7
  Bottom 0.254: v45.11,26.82 45.11,28.35 46.53,29.77 46.53,30.79 TEENSY.53
LED4
  Top 0.254: TEENSY.0 82.09,20.62 82.09,17.07 74.78,9.75 62.48,9.75 59.44,12.8 58.22,12.8 55.37,9.96 49.38,9.96 47.24,7.82 40.13,7.82 38.3,9.65 STRIP4.7
LED5
  Top 0.254: TEENSY.55 64.41,30.79 65.43,30.79 66.45,29.77 67.36,29.77 68.38,30.79 68.38,33.12 70.81,35.56 70.81,47.14 72.95,49.28 72.95,58.83 76.71,62.59 STRIP5.7
LED6
  Top 0.254: TEENSY.57 69.39,30.79 68.99,30.79 67.56,29.36 64.31,29.36 62.89,30.79 62.89,40.13 55.17,47.85 55.17,62.28 55.47,62.59 STRIP6.7
M_INA
  Top 0.254: TEENSY.45 31.39,28.35 32.41,28.35 33.73,29.67 36.98,29.67 37.69,30.38 37.69,31.29 35.15,33.83 28.45,33.83 27.33,34.95 27.33,60.35 25.6,62.08 25.6,64.11 26.82,65.33 J4.2
M_INB  (via drill 0.38)
  Top 0.254: v22.05,29.97 23.06,29.97 29.16,23.88 30.28,23.88 30.68,24.28 30.68,24.89 28.85,26.72 28.85,28.25 TEENSY.46 | v18.69,33.33 19,33.33 v21.95,36.27 | v21.95,52.63 23.67,54.36 23.67,67.16 24.08,67.56 27.23,67.56 29.36,65.43 J4.4
  Bottom 0.254: v18.69,33.33 v22.05,29.97 | v21.95,52.63 v21.95,36.27
M_PWMA
  Bottom 0.254: TEENSY.36 33.83,35.97 33.83,42.47 26.92,49.38 26.92,62.59 J4.1
M_PWMB  (via drill 0.38)
  Top 0.254: v28.04,47.24 28.04,47.65 27.84,47.85 27.84,60.25 29.36,61.77 29.36,62.59 J4.3
  Bottom 0.254: v28.04,47.24 31.29,43.99 31.29,35.97 TEENSY.35
N$2
  Bottom 0.254: R1.2 77.01,2.64 76.3,3.35 76.2,3.35 73.66,5.89 73.66,8.64 66.04,16.26 60.96,16.26 57.61,19.61 56.29,19.61 55.68,20.22 55.68,26.42 55.98,26.72 LED1.A
N$3  (via drill 0.38)
  Top 0.254: v74.47,10.46 62.38,10.46 59.64,13.21 56.49,13.21 55.98,12.7 SW2.2
  Bottom 0.254: v74.47,10.46 76,8.94 78.33,8.94 U1.5
N$4
  Bottom 0.254: RELAY1.1 54.86,1.93 55.68,1.93 56.9,0.71 85.85,0.71 87.07,1.93 87.07,11.28 86.36,11.99 78.94,11.99 78.44,11.48 U1.7
N$5  (via drill 0.38)
  Top 0.254: v83.62,4.67 83.82,4.67 v85.04,5.89 91.14,5.89 91.44,5.59 93.17,5.59 97.94,10.36 97.94,24.28 96.01,26.21 96.01,38.61 97.94,40.54 v97.94,51.31
  Bottom 0.254: v83.62,4.67 81.79,4.67 R2.2 | v85.04,5.89 85.04,5.59 85.95,4.67 R3.1 | v97.94,51.31 97.94,51.71 87.07,62.59 87.07,74.27 88.09,75.29 J12.1
N$6  (via drill 0.38)
  Top 0.254: v90.12,38.71 90.02,38.61 90.02,22.35 72.64,4.98 72.64,2.03 RELAY1.8
  Bottom 0.254: v90.12,38.71 93.47,42.06 93.47,43.59 98.65,48.77 98.65,51.61 89.61,60.66 89.61,67.26 J3.PWR
PI-REST
  Bottom 0.254: R2.1 81.69,2.74 79.86,4.57 79.86,9.25 79.05,10.06 78.44,10.06 U1.6
PWM1
  Bottom 0.254: U2.8 71.83,17.37 71.83,17.78 73.66,19.61 76,19.61 77.01,20.62 TEENSY.2
PWM2
  Bottom 0.254: U2.7 70.61,17.37 70.61,17.58 73.66,20.62 74.47,20.62 TEENSY.3
PWM3
  Bottom 0.254: U2.6 69.29,17.37 69.29,17.98 71.93,20.62 TEENSY.4
PWM4
  Bottom 0.254: U2.5 68.07,17.37 68.07,19.3 69.39,20.62 TEENSY.5
PWM5
  Bottom 0.254: U2.4 66.75,17.37 66.75,20.52 66.85,20.62 TEENSY.6
PWM6
  Bottom 0.254: U2.3 65.43,17.37 65.43,19.61 64.41,20.62 TEENSY.7
PWM7
  Bottom 0.254: U2.2 64.11,17.37 64.11,18.39 61.87,20.62 TEENSY.8
PWM8
  Bottom 0.254: U2.1 62.89,17.37 60.55,17.37 59.33,18.59 59.33,20.62 TEENSY.9
PWM9
  Bottom 0.254: U$2.8 51.92,45.31 51.92,44.91 44.6,37.59 38.1,37.59 36.47,35.97 TEENSY.37
PWM10  (via drill 0.38)
  Top 0.254: v46.02,22.76 44.6,22.76 42.57,20.73 42.57,19.2 v42.27,18.9
  Bottom 0.254: v46.02,22.76 52.73,29.46 52.73,35.97 55.17,38.41 55.17,46.23 54.97,46.43 54.15,46.43 53.34,45.62 53.34,45.41 U$2.7 | v42.27,18.9 35.66,18.9 35.56,18.8 34.95,18.8 33.93,19.81 33.93,20.62 TEENSY.29
PWM11
  Bottom 0.254: U$2.6 54.46,45.31 54.46,45.01 46.63,37.19 40.23,37.19 39.01,35.97 TEENSY.38
PWM12
  Bottom 0.254: U$2.5 55.78,45.31 55.78,37.49 54.25,35.97 TEENSY.14
PWM13  (via drill 0.38)
  Top 0.254: v54.46,50.6 54.46,51.71 v45.72,60.45 | v39.42,64.82 34.75,69.49 25.4,69.49 v20.32,64.41 | v14.02,58.12 14.02,50.6 3.86,40.44 3.86,34.75 10.06,28.55 14.83,28.55 v19.2,24.18
  Bottom 0.254: v54.46,50.6 57,48.06 57,45.41 U$2.4 | v45.72,60.45 44.3,60.45 39.93,64.82 v39.42,64.82 | v14.02,58.12 v20.32,64.41 | v19.2,24.18 24.38,19 29.67,19 31.29,20.62 TEENSY.30
PWM14
  Bottom 0.254: U$2.3 58.42,45.31 58.42,36.78 59.23,35.97 TEENSY.16
PWM15
  Bottom 0.254: U$2.2 59.64,45.31 59.64,37.08 60.35,36.37 60.35,32.11 58.83,30.58 58.83,22.76 56.79,20.73 TEENSY.10
PWM16
  Bottom 0.254: U$2.1 60.96,45.31 60.96,36.78 61.77,35.97 TEENSY.17
PWM_1  (via drill 0.38)
  Top 0.254: v59.33,11.28 v61.57,9.04 | v35.97,24.28 32.31,24.28 v29.57,27.03
  Bottom 0.254: v61.57,9.04 62.89,7.72 U2.20 | v59.33,11.28 59.33,12.39 55.88,15.85 49.89,15.85 45.11,20.62 45.11,21.13 41.96,24.28 v35.97,24.28 | v29.57,27.03 23.98,27.03 17.37,33.63 17.37,35.05 16.56,35.87 12.29,35.87 11.07,34.65 STRIP1.5
PWM_2  (via drill 0.38)
  Top 0.254: v44.09,11.07 42.98,11.07 42.06,11.99 42.06,13.11 40.44,14.73 40.44,21.13 46.53,27.23 47.04,27.23 47.65,27.84 47.65,28.75 46.63,29.77 43.59,29.77 42.57,30.79 42.57,31.29 39.32,34.54 v28.75,34.54 | v24.79,34.54 22.35,36.98 17.48,36.98 16.46,35.97 12.39,35.97 11.07,37.29 STRIP1.6
  Bottom 0.254: v44.09,11.07 46.43,11.07 48.16,9.35 48.77,9.35 48.97,9.55 56.49,9.55 59.44,6.6 63.3,6.6 64.11,7.42 64.11,7.62 U2.19 | v24.79,34.54 v28.75,34.54
PWM_3  (via drill 0.38)
  Top 0.254: v64.31,9.04 62.59,9.04 59.54,12.09 v58.62,12.09 | v35.97,22.66 12.39,22.66 2.64,32.41 2.64,43.38 8.03,48.77 8.03,59.64 10.97,62.59 STRIP2.5
  Bottom 0.254: v64.31,9.04 65.43,7.92 65.43,7.72 U2.18 | v58.62,12.09 55.78,14.94 47.24,14.94 42.57,19.61 38.51,19.61 37.49,20.62 37.49,21.13 v35.97,22.66
PWM_4  (via drill 0.38)
  Top 0.254: v28.04,11.58 27.23,11.58 v26.62,12.19 | v16.56,23.37 12.29,23.37 3.05,32.61 3.05,43.18 8.43,48.56 8.43,59.13 10.67,61.37 11.48,61.37 12.29,62.18 12.29,64.11 11.07,65.33 STRIP2.6
  Bottom 0.254: v28.04,11.58 31.19,8.43 37.08,8.43 40.95,4.57 58.93,4.57 59.44,5.08 66.85,5.08 68.58,6.81 68.58,8.64 68.48,8.74 67.56,8.74 66.75,7.92 66.75,7.72 U2.17 | v26.62,12.19 26.62,13.31 v16.56,23.37
PWM_5  (via drill 0.38)
  Top 0.254: v46.84,6.2 46.53,6.2 46.13,6.6 v36.27,6.6 | v28.45,6.6 25.81,6.6 v25.3,6.1
  Bottom 0.254: v46.84,6.2 66.65,6.2 67.36,6.91 67.36,7.01 67.97,7.62 U2.16 | v28.45,6.6 v36.27,6.6 | v25.3,6.1 22.86,6.1 19.41,9.55 STRIP3.5
PWM_6  (via drill 0.38)
  Top 0.254: v57.71,9.35 56.69,9.35 56.49,9.55 51.21,9.55 46.53,4.88 v39.62,4.88 | v26.72,5.89 26.11,5.89 25.3,5.08 24.28,5.08 v23.98,4.78
  Bottom 0.254: v57.71,9.35 57.81,9.35 58.22,9.75 68.07,9.75 69.19,8.64 69.19,7.72 U2.15 | v39.62,4.88 37.19,7.32 28.14,7.32 v26.72,5.89 | v23.98,4.78 22.35,4.78 18.09,9.04 18.09,11.07 19.3,12.29 STRIP3.6
PWM_7  (via drill 0.38)
  Top 0.254: v48.46,10.06 48.26,10.06 46.43,8.23 42.27,8.23 40.84,9.65 STRIP4.5
  Bottom 0.254: v48.46,10.06 57.91,10.06 58.01,10.16 68.28,10.16 70.51,7.92 70.51,7.72 U2.14
PWM_8  (via drill 0.38)
  Top 0.254: v58.83,5.49 v69.8,5.49
  Bottom 0.254: v69.8,5.49 71.73,7.42 71.73,7.62 U2.13 | v58.83,5.49 46.63,5.49 46.13,4.98 45.31,4.98 42.06,8.23 42.06,11.18 40.84,12.39 STRIP4.6
PWM_9
  Bottom 0.254: U$2.20 60.96,55.07 64.72,55.07 71.02,61.37 72.95,61.37 74.17,62.59 STRIP5.5
PWM_10
  Bottom 0.254: U$2.19 59.64,54.97 59.64,54.76 60.45,53.95 64.21,53.95 71.22,60.96 74.37,60.96 75.49,62.08 75.49,64.11 74.27,65.33 STRIP5.6
PWM_11
  Bottom 0.254: U$2.18 58.32,55.07 58.32,57.3 53.03,62.59 STRIP6.5
PWM_12
  Bottom 0.254: U$2.17 57,55.07 57,56.79 51.71,62.08 51.71,64.11 52.93,65.33 STRIP6.6
PWM_13
  Bottom 0.254: U$2.16 55.78,55.07 55.78,55.88 55.17,56.49 34.95,56.49 S1.A
PWM_14
  Bottom 0.254: U$2.15 54.46,54.97 54.46,54.56 52.32,52.43 47.24,52.43 45.01,54.66 43.18,54.66 42.06,53.54 S2.A
PWM_15  (via drill 0.38)
  Top 0.254: v58.52,53.54 63.8,53.54 64.92,54.66 66.85,54.66 67.97,53.54 S3.A
  Bottom 0.254: v58.52,53.54 55.78,53.54 55.17,54.15 55.17,55.88 54.97,56.08 54.15,56.08 53.34,55.27 53.34,55.07 U$2.14
PWM_16  (via drill 0.38)
  Top 0.254: v53.75,51.41 v52.02,53.14
  Bottom 0.254: v52.02,53.14 52.02,54.97 U$2.13 | v53.75,51.41 60.25,51.41 64.82,46.84 67.97,46.84 69.19,48.06 69.19,50.09 68.89,50.39 68.89,52.83 69.39,53.34 69.39,54.05 70,54.66 76.81,54.66 77.93,53.54 S4.A
S1
  Bottom 0.254: 30.68,63.91 26.42,63.91 25.6,63.09 25.6,56.29 22.66,53.34 22.66,38.71 25.4,35.97 26.21,35.97 TEENSY.33 | 30.68,63.91 31.9,62.69 J4.5 | 30.68,63.91 30.68,65.84 35.05,70.21 35.05,75.18 J1.3
S2  (via drill 0.38)
  Top 0.254: TEENSY.34 28.75,35.97 28.75,47.55 28.25,48.06 28.25,59.64 30.68,62.08 30.68,64.11 31.9,65.33 J4.6 31.6,65.13 27.94,68.78 v26.31,68.78
  Bottom 0.254: v26.31,68.78 24.28,70.81 24.28,75.29 J2.3

## Text on the board
tPlace: MOL v2-3 | 2017 Ali Momeni / Made in PGH
bPlace: MOL v2-3 | 2017 Ali Momeni / Made in PGH